# Altium PCB HD301_driver.PcbDoc (part 2 of 2)
Units mm, origin at the board's own origin, x right, y up, seen from the top; angles counter-clockwise.
Board outline 50 x 25 mm, 4 copper layers (Top, GND, POWER, Bottom), stack 0.899 mm thick; 105 components, 92 nets, 393 pads, 168 vias.
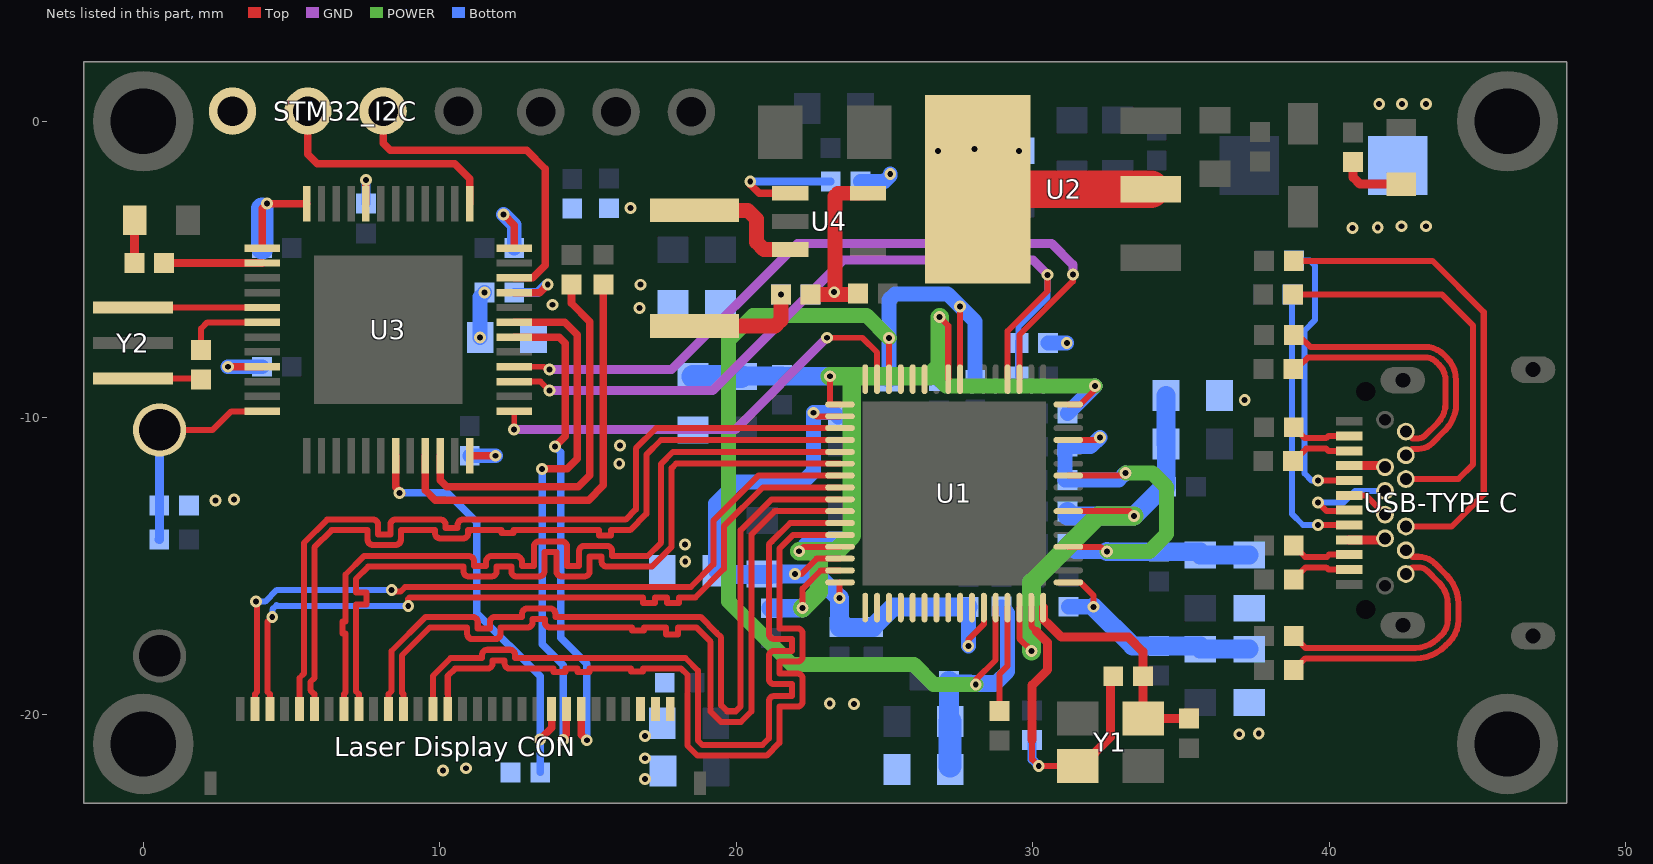
[diagram p4: the nets of this part, all layers, seen from the top]

## Via types
v1: diameter 0.4, hole 0.2, Top to Bottom, 155 vias
v2: diameter 0.6, hole 0.4, Top to Bottom, 12 vias
v3: diameter 1.6, hole 1, Top to Bottom, 1 vias

## Nets (pads, with @x,y where several pads share a name; then routed paths per layer and width w, separated by ;. In a path a pad name is that pad's centre, name@x,y a point inside that pad or via, vN(x,y) a via of type N, cw(c..) or ccw(c..) an arc to the next point about the centre after c; other vN are vias at no path point) (continued)
HD_RESET: "Laser Display CON.9" R17.1 U3.19 | length 14.9
  Top w0.254: U3.19@8.51,-11.28 8.51,-12.347 8.665,-12.501 v1@8.725,-12.562 ; v1(13.374,-20.849) 13.77,-20.453 13.77,-19.82
  Bottom w0.254: v1(8.636,-12.53) 10.254,-12.53 11.25,-13.526 11.25,-16.587 13.386,-18.723 13.386,-20.849 R17.1@13.386,-21.96
IIS_D0: U1.32
IIS_MCLK: U1.29
IIS_SCLK: U1.28
IIS_WS: U1.27
LED: R16.1 U3.2 | length 3.3
  Top w0.254: R16.1@0.7,-4.78 U3.2@4.01,-4.78
MIPI_N0_CLK_N: U1.54
MIPI_N0_CLK_P: U1.53
MIPI_N0_D0_N: U1.50
MIPI_N0_D0_P: U1.49
MIPI_N0_D1_N: U1.52
MIPI_N0_D1_P: U1.51
MIPI_N0_D2_N: U1.56
MIPI_N0_D2_P: U1.55
MIPI_N0_D3_N: U1.58
MIPI_N0_D3_P: U1.57
MIPI_N1_CLK_N: "Laser Display CON.28" U1.40 | length 26.1
  Top w0.203: 4.27,-19.82 4.27,-19.318 4.198,-19.246 4.198,-16.875 v1(4.351,-16.722) ; v1(8.936,-16.347) 8.926,-16.337 8.926,-16.112 8.978,-16.06 10.041,-16.06 16.846,-16.06 16.846,-16.244 17.252,-16.244 17.252,-16.06 17.659,-16.06 17.659,-16.244 18.065,-16.244 18.065,-16.06 18.268,-16.06 18.617,-16.06 19.582,-15.095 19.582,-13.659 20.892,-12.349 U1.40@23.496,-12.349
  Bottom w0.203: v1(4.351,-16.722) 4.351,-16.46 4.494,-16.317 4.524,-16.347 v1(8.936,-16.347)
MIPI_N1_CLK_P: "Laser Display CON.29" U1.39 | length 26
  Top w0.203: 3.77,-19.82 3.77,-19.318 3.842,-19.246 3.842,-16.242 v1(3.798,-16.198) ; v1(8.379,-15.802) 8.438,-15.861 8.675,-15.861 8.831,-15.705 18.467,-15.705 19.227,-14.946 19.227,-13.467 20.744,-11.949 U1.39@23.496,-11.949
  Bottom w0.203: v1(3.798,-16.198) 4.11,-16.198 4.507,-15.802 v1(8.379,-15.802)
MIPI_N1_D0_N: "Laser Display CON.25" U1.36 | length 27.8
  Top w0.203: 5.77,-19.82 5.77,-19.318 5.636,-19.184 5.636,-18.911 5.77,-18.776 5.77,-14.758 5.77,-14.371 6.352,-13.789 7.569,-13.789 7.569,-14.111 ccw(c7.746,-14.111) 7.746,-14.289 8.508,-14.289 ccw(c8.508,-14.111) 8.686,-14.111 8.686,-13.789 9.842,-13.789 9.842,-13.891 ccw(c10.02,-13.891) 10.02,-14.068 10.782,-14.068 ccw(c10.782,-13.891) 10.96,-13.891 10.96,-13.789 11.477,-13.789 11.68,-13.789 12.086,-13.789 12.086,-13.891 12.493,-13.891 12.493,-13.789 12.922,-13.789 13.356,-13.789 15.362,-13.789 15.362,-13.965 15.769,-13.965 15.769,-13.789 15.972,-13.789 16.417,-13.789 16.966,-13.24 16.966,-11.243 17.46,-10.749 U1.36@23.496,-10.749
MIPI_N1_D0_P: "Laser Display CON.26" U1.35 | length 27.8
  Top w0.203: 5.27,-19.82 5.27,-18.774 5.414,-18.629 5.414,-16.864 5.414,-14.224 6.205,-13.433 7.746,-13.433 cw(c7.746,-13.611) 7.924,-13.611 7.924,-13.933 8.331,-13.933 8.331,-13.611 cw(c8.508,-13.611) 8.508,-13.433 10.02,-13.433 cw(c10.02,-13.611) 10.198,-13.611 10.198,-13.713 10.604,-13.713 10.604,-13.611 cw(c10.782,-13.611) 10.782,-13.433 16.268,-13.433 16.611,-13.091 16.611,-11.029 17.291,-10.349 U1.35@23.496,-10.349
MIPI_N1_D1_N: "Laser Display CON.22" U1.38 | length 28
  Top w0.203: 7.27,-19.82 7.27,-19.318 7.175,-19.224 7.175,-17.929 7.175,-16.304 7.533,-16.304 7.533,-15.897 7.175,-15.897 7.175,-15.694 7.175,-15.432 7.587,-15.02 10.8,-15.02 10.8,-15.172 ccw(c10.977,-15.172) 10.977,-15.35 11.739,-15.35 ccw(c11.739,-15.172) 11.917,-15.172 11.917,-15.02 12.412,-15.02 12.412,-15.172 ccw(c12.59,-15.172) 12.59,-15.35 13.351,-15.35 ccw(c13.351,-15.172) 13.529,-15.172 13.529,-14.52 13.935,-14.52 13.935,-15.172 ccw(c14.113,-15.172) 14.113,-15.35 14.875,-15.35 ccw(c14.875,-15.172) 15.052,-15.172 15.052,-14.676 15.459,-14.676 15.459,-14.843 ccw(c15.636,-14.843) 15.636,-15.02 17.152,-15.02 17.817,-14.355 17.817,-12.116 ; 17.817,-11.907 17.817,-12.116 ; U1.38@23.496,-11.549 17.966,-11.549 17.817,-11.698 17.817,-12.116
MIPI_N1_D1_P: "Laser Display CON.23" U1.37 | length 27.8
  Top w0.203: 6.77,-19.82 6.77,-19.318 6.82,-19.268 6.82,-17.667 6.82,-17.279 6.719,-17.279 6.719,-16.872 6.82,-16.872 6.82,-16.466 6.82,-16.263 6.82,-15.285 7.44,-14.665 10.977,-14.665 cw(c10.977,-14.843) 11.155,-14.843 11.155,-14.995 11.561,-14.995 11.561,-14.843 cw(c11.739,-14.843) 11.739,-14.665 12.59,-14.665 cw(c12.59,-14.843) 12.767,-14.843 12.767,-14.995 13.174,-14.995 13.174,-14.343 cw(c13.351,-14.343) 13.351,-14.165 14.113,-14.165 cw(c14.113,-14.343) 14.291,-14.343 14.291,-14.995 14.697,-14.995 14.697,-14.498 cw(c14.875,-14.498) 14.875,-14.321 15.636,-14.321 cw(c15.636,-14.498) 15.814,-14.498 15.814,-14.665 17.004,-14.665 17.462,-14.207 17.462,-11.551 17.864,-11.149 U1.37@23.496,-11.149
MIPI_N1_D2_N: "Laser Display CON.19" U1.42 | length 27.9
  Top w0.203: 8.77,-19.82 8.77,-19.318 8.727,-19.275 8.727,-18.012 9.669,-17.069 10.925,-17.069 10.925,-17.289 ccw(c11.102,-17.289) 11.102,-17.467 11.864,-17.467 ccw(c11.864,-17.289) 12.042,-17.289 12.042,-17.069 12.956,-17.069 ccw(c12.956,-16.891) 13.133,-16.891 13.133,-16.783 13.54,-16.783 13.54,-16.891 ccw(c13.718,-16.891) 13.718,-17.069 15.537,-17.069 16.48,-17.069 16.48,-17.171 16.886,-17.171 16.886,-17.069 17.089,-17.069 17.627,-17.069 17.627,-17.306 18.034,-17.306 18.034,-17.069 18.237,-17.069 18.651,-17.069 19.135,-17.553 19.135,-19.911 19.475,-20.251 20.157,-20.251 20.503,-19.905 20.503,-13.939 21.294,-13.149 U1.42@23.496,-13.149
MIPI_N1_D2_P: "Laser Display CON.20" U1.41 | length 27.8
  Top w0.203: 8.27,-19.82 8.27,-19.318 8.371,-19.217 8.371,-17.865 9.522,-16.714 11.102,-16.714 cw(c11.102,-16.891) 11.28,-16.891 11.28,-17.112 11.687,-17.112 11.687,-16.891 cw(c11.864,-16.891) 11.864,-16.714 12.778,-16.714 12.778,-16.605 cw(c12.956,-16.605) 12.956,-16.427 13.718,-16.427 cw(c13.718,-16.605) 13.895,-16.605 13.895,-16.714 18.737,-16.714 ; 18.738,-16.714 18.798,-16.714 19.326,-17.243 19.49,-17.406 19.49,-19.696 19.69,-19.896 19.98,-19.896 20.148,-19.728 20.148,-13.792 21.191,-12.749 U1.41@23.496,-12.749
MIPI_N1_D3_N: "Laser Display CON.16" U1.44 | length 27.9
  Top w0.203: 10.27,-19.82 10.27,-19.318 10.268,-19.317 10.268,-18.705 10.516,-18.457 11.602,-18.457 ccw(c11.602,-18.279) 11.78,-18.279 11.78,-18.178 12.186,-18.178 12.186,-18.279 ccw(c12.364,-18.279) 12.364,-18.457 13.223,-18.457 13.426,-18.457 13.833,-18.457 13.833,-18.566 14.239,-18.566 14.239,-18.457 14.646,-18.457 14.646,-18.566 15.052,-18.566 15.052,-18.457 15.84,-18.457 16.044,-18.457 16.45,-18.457 16.45,-18.558 16.856,-18.558 16.856,-18.457 16.983,-18.457 18.138,-18.457 18.353,-18.672 18.353,-21.053 18.69,-21.39 21.024,-21.39 21.451,-20.963 21.451,-19.742 22.059,-19.742 ccw(c22.059,-19.564) 22.237,-19.564 22.237,-18.802 ccw(c22.059,-18.802) 22.059,-18.625 21.451,-18.625 21.451,-18.218 22.059,-18.218 ccw(c22.059,-18.041) 22.237,-18.041 22.237,-17.279 ccw(c22.059,-17.279) 22.059,-17.102 21.451,-17.102 21.451,-16.393 21.451,-14.416 21.918,-13.949 U1.44@23.496,-13.949
MIPI_N1_D3_P: "Laser Display CON.17" U1.43 | length 27.9
  Top w0.203: 9.77,-19.82 9.77,-18.7 10.369,-18.102 11.425,-18.102 11.425,-18 cw(c11.602,-18) 11.602,-17.822 12.364,-17.822 cw(c12.364,-18) 12.542,-18 12.542,-18.102 18.285,-18.102 18.708,-18.525 18.708,-20.89 18.853,-21.035 20.877,-21.035 21.095,-20.816 21.095,-19.564 cw(c21.273,-19.564) 21.273,-19.386 21.882,-19.386 21.882,-18.98 21.273,-18.98 cw(c21.273,-18.802) 21.095,-18.802 21.095,-18.041 cw(c21.273,-18.041) 21.273,-17.863 21.882,-17.863 21.882,-17.457 21.273,-17.457 cw(c21.273,-17.279) 21.095,-17.279 21.095,-14.269 21.2,-14.165 21.815,-13.549 U1.43@23.496,-13.549
NetC1_1: "USB-TYPE C.A2" C1.1 | length 2.1
  Top w0.203: C1.1@38.795,-15.449 39.201,-15.043 39.89,-15.043 39.962,-15.115 40.666,-15.115
NetC2_1: "USB-TYPE C.A3" C2.1 | length 2.1
  Top w0.203: C2.1@38.795,-14.306 39.176,-14.687 39.913,-14.687 39.985,-14.615 40.666,-14.615
NetC3_1: "USB-TYPE C.B8" C3.1 | length 16.3
  Top w0.203: C3.1@38.795,-4.71 43.474,-4.71 45.203,-6.439 45.203,-12.583 44.121,-13.665 42.576,-13.665
NetC4_1: "USB-TYPE C.A8" C4.1 | length 9.6
  Top w0.203: v1(39.613,-12.119) 40.662,-12.119 40.666,-12.115
  Bottom w0.203: C4.1@38.8,-4.7 39.35,-4.7 39.52,-4.87 39.52,-6.7 39.163,-7.057 39.163,-11.879 39.403,-12.119 v1(39.613,-12.119)
NetC5_1: "USB-TYPE C.B3" C5.1 | length 9.5
  Top w0.2: C5.1@39.009,-7.259 39.358,-7.607 43.215,-7.607
  Top w0.203: 42.576,-11.265 42.792,-11.049 43.002,-11.049 ccw(c43.002,-10.39) 43.467,-10.856 43.895,-10.428 ccw(c42.984,-9.517) 44.272,-9.517 44.272,-8.743 ccw(c43.168,-8.743) 43.949,-7.962 43.862,-7.875 ccw(c43.215,-8.523) 43.215,-7.607
NetC6_1: "USB-TYPE C.B2" C6.1 | length 8.4
  Top w0.2: C6.1@38.974,-8.269 39.281,-7.963 43.214,-7.963
  Top w0.203: 42.576,-10.465 42.804,-10.693 42.999,-10.693 ccw(c42.999,-10.384) 43.218,-10.603 43.642,-10.178 ccw(c42.98,-9.516) 43.917,-9.516 43.917,-8.745 ccw(c43.163,-8.745) 43.696,-8.212 43.611,-8.127 ccw(c43.214,-8.524) 43.214,-7.963
NetC44_1: "Laser Display CON.1" "Laser Display CON.2" "Laser Display CON.3" C44.1 C45.1 FB4.2
  other v1: 16.922,-22.186 16.922,-21.481 16.917,-20.729
NetC52_1: C52.1 C53.1 C57.2 FB5.1 FB6.1 FB7.1 FB8.1 L1.2 R21.2 | length 3.9
  Top w0.5: L1.2@18.595,-6.906 21.314,-6.906 21.504,-6.716 v1(21.504,-5.84)
  other v1: 36.958,-20.672 37.617,-20.646 23.972,-19.655 23.149,-19.632 18.278,-14.847 18.274,-14.273 16.734,-6.294 16.765,-5.512
NetC57_1: C57.1 R21.1 R22.2 U4.5 | length 6.8
  Top w0.5: R21.1@22.504,-5.84 23.3,-5.84 R22.2@24.104,-5.84 ; v1@23.322,-5.765 23.322,-2.539 23.431,-2.43 U4.5@24.44,-2.43
  Bottom w0.5: C57.1@22.504,-5.84 v1@23.3,-5.84
  other v1: 23.3,-5.765
NetL1_1: L1.1 U4.3 | length 4.2
  Top w0.5: L1.1@18.595,-3.006 20.387,-3.006 20.682,-3.302 20.682,-4.08 20.932,-4.33 U4.3@21.82,-4.33
NetLED1_1: LED1.1 R12.2 | length 2.2
  Top w0.305: R12.2@40.798,-1.374 40.798,-1.888 41.031,-2.122 LED1.1@42.425,-2.122
NetLED2_1: LED2.1 R16.2 | length 1.4
  Top w0.305: R16.2@-0.3,-4.78 -0.29,-4.77 LED2.1@-0.29,-3.34
NetR1_2: "USB-TYPE C.B11" R1.2 | length 8.6
  Top w0.203: R1.2@38.795,-17.362 39.189,-17.756 42.899,-17.756 ccw(c42.899,-16.678) 43.661,-17.44 43.783,-17.319 ccw(c43.285,-16.82) 43.989,-16.82 43.989,-16.273 ccw(c42.981,-16.273) 43.694,-15.56 43.296,-15.163 ccw(c43.005,-15.454) 43.005,-15.042 42.799,-15.042 42.576,-15.265
NetR2_2: "USB-TYPE C.B10" R2.2 | length 9.7
  Top w0.203: R2.2@38.795,-18.505 39.189,-18.112 42.9,-18.112 ccw(c42.9,-16.68) 43.912,-17.692 44.036,-17.568 ccw(c43.29,-16.823) 44.345,-16.823 44.345,-16.271 ccw(c42.987,-16.271) 43.947,-15.311 43.547,-14.91 ccw(c43.006,-15.45) 43.006,-14.686 42.797,-14.686 42.576,-14.465
NetR3_1: "USB-TYPE C.A5" R3.1 | length 9.7
  Top w0.203: v1(39.613,-13.615) 40.666,-13.615
  Bottom w0.203: R3.1@38.73,-5.62 38.73,-5.84 38.73,-13.236 39.11,-13.615 v1(39.613,-13.615)
NetR4_2: "USB-TYPE C.B5" R4.2 | length 13.7
  Top w0.203: R4.2@38.77,-5.84 43.79,-5.84 44.833,-6.883 44.833,-11.582 44.35,-12.065 42.576,-12.065
NetR5_1: "USB-TYPE C.A10" R5.1 | length 2.1
  Top w0.203: R5.1@38.795,-11.461 39.213,-11.043 39.89,-11.043 39.962,-11.115 40.666,-11.115
NetR6_1: "USB-TYPE C.A11" R6.1 | length 2.1
  Top w0.203: R6.1@38.795,-10.318 39.164,-10.687 39.89,-10.687 39.962,-10.615 40.666,-10.615
NetR13_1: R13.1 U3.22 | length 12.8
  Top w0.254: U3.22@10.01,-11.28 10.01,-12.112 10.229,-12.33 14.663,-12.33 15.063,-11.931 15.063,-6.766 14.441,-6.144 R13.1@14.441,-5.505
NetR14_1: R14.1 U3.21 | length 14.3
  Top w0.254: U3.21@9.51,-11.28 9.51,-12.435 9.852,-12.776 15.021,-12.776 15.516,-12.281 R14.1@15.516,-5.5
NetR18_1: R18.1 U3.6 | length 2.9
  Top w0.203: R18.1@1.95,-7.71 1.95,-6.99 2.16,-6.78 U3.6@4.01,-6.78
NetR18_2: R18.2 Y2.2 | length 2.3
  Top w0.203: Y2.2@-0.34,-8.68 1.92,-8.68 R18.2@1.95,-8.71
NetR19_1: R19.1 U3.33 | length 2.5
  Top w0.254: U3.33@12.51,-5.78 13.365,-5.78 v1(13.641,-5.504)
  Bottom w0.3: R19.1@12.51,-5.78 13.293,-5.78 13.569,-5.504 v1(13.641,-5.504)
NetR20_2: R20.2 U4.1 | length 4.3
  Top w0.254: v1(20.468,-2.032) 20.468,-2.133 20.765,-2.43 U4.1@21.82,-2.43
  Bottom w0.254: v1(20.468,-2.032) R20.2@23.182,-2.032
NetR23_2: R23.2 U3.44 | length 1.6
  Top w0.254: U3.44@7.51,-2.78 v1@7.51,-2.017
  Bottom w0.3: R23.2@7.51,-2.78 v1(7.51,-1.987)
NetU3_5: U3.5 Y2.1 | length 4.4
  Top w0.203: Y2.1@-0.34,-6.28 U3.5@4.01,-6.28
NRST: C49.1 R15.2 RESET.1 U3.12 | length 7.4
  Top w0.203: RESET.1@0.55,-10.41 2.34,-10.41 2.97,-9.78 U3.12@4.01,-9.78
  Bottom w0.305: C49.1@0.54,-14.106 0.55,-14.096 0.55,-12.961 RESET.1@0.55,-10.41
REXT: R11.2 U1.61 | length 3.6
  Top w0.203: R11.2@28.878,-19.882 28.878,-18.635 29.146,-18.367 U1.61@29.146,-16.399
RSTN: C7.1 R7.2 U1.20 U3.27 | length 28.1
  Top w0.2: U3.27@12.51,-8.78 13.395,-8.78 v1(13.694,-9.08) v1@13.709,-9.094 ; U1.20@29.146,-8.699 29.146,-7.077 30.497,-5.726 v1(30.497,-5.178)
  GND w0.305: v1(13.694,-9.08) 19.203,-9.08 23.597,-4.686 30.004,-4.686 v1(30.497,-5.178)
  Bottom w0.203: C7.1@29.505,-8.603 29.505,-7.48 29.505,-7.412 R7.2@29.51,-7.412 ; R7.2@29.51,-7.48 R7.2@29.51,-7.412 ; v1(30.497,-5.178) 30.497,-5.944 29.51,-6.931 R7.2@29.51,-7.412
SLEEP_33: U1.19 U3.28 | length 25.5
  Top w0.2: U3.28@12.51,-8.28 13.517,-8.28 v1@13.656,-8.419 ; U1.19@29.546,-8.699 29.546,-7.203 31.349,-5.4 v1(31.349,-5.17)
  GND w0.305: v1(13.704,-8.375) 17.812,-8.375 22.064,-4.123 30.632,-4.123 31.349,-4.839 v1(31.349,-5.17)
SWCLK: STM32_I2C.2 U3.37 | length 8.1
  Top w0.254: STM32_I2C.2@5.55,0.34 5.55,-1.111 5.875,-1.436 10.506,-1.436 11.01,-1.94 U3.37@11.01,-2.78
SWDIO: STM32_I2C.3 U3.34 | length 11.4
  Top w0.254: STM32_I2C.3@8.09,0.34 8.09,-0.738 8.33,-0.978 12.926,-0.978 13.558,-1.61 13.558,-4.851 13.13,-5.28 U3.34@12.51,-5.28
UART_RX: "Laser Display CON.8" U3.31 | length 18.3
  Top w0.254: U3.31@12.51,-6.78 14.218,-6.78 14.64,-7.202 14.64,-11.38 14.294,-11.726 v1(13.449,-11.726) ; v1(14.16,-20.861) 14.27,-20.751 14.27,-19.82
  Bottom w0.254: v1(13.449,-11.726) 13.449,-17.632 14.16,-18.343 v1(14.16,-20.861)
UART_TX: "Laser Display CON.7" U3.30 | length 16.9
  Top w0.254: U3.30@12.51,-7.28 14.026,-7.28 14.23,-7.484 14.23,-10.624 v1(13.88,-10.974) ; 14.77,-19.82 14.77,-20.687 v1(14.958,-20.875)
  Bottom w0.254: v1(13.88,-10.974) 14.077,-11.171 14.077,-17.417 14.958,-18.298 v1(14.958,-20.875)
USB_D_N: "USB-TYPE C.A7" "USB-TYPE C.B7" | length 1.5
  Top w0.203: 40.666,-12.615 41.226,-12.615 41.876,-13.265
USB_D_P: "USB-TYPE C.A6" "USB-TYPE C.B6" | length 3.6
  Top w0.203: v1(39.613,-12.859) 39.903,-13.149 40.666,-13.149 40.666,-13.115
  Bottom w0.203: v1(39.613,-12.859) 40.467,-12.859 40.861,-12.465 41.876,-12.465
VBUS: "USB-TYPE C.A4" "USB-TYPE C.A9" "USB-TYPE C.B4" "USB-TYPE C.B9" D1.A | length 2.5
  Top w0.305: 40.661,-11.61 40.666,-11.615 41.876,-11.615 41.876,-11.665 ; 40.666,-14.115 41.876,-14.115 41.876,-14.065
  other v1: 40.781,-3.603 41.628,-3.577 42.425,-3.541 43.26,-3.541 41.678,0.583 42.45,0.583 43.26,0.583
VCC12_TX: C33.1 C34.1 C35.1 C36.1 C37.1 FB6.2 U1.34 U1.46 U1.48 U1.59 | length 24.6
  Top w0.203: v1(21.98,-15.271) 22.189,-15.271 22.711,-14.749 U1.46@23.496,-14.749 ; v1(22.605,-9.83) 22.724,-9.949 U1.34@23.496,-9.949 ; v1(23.478,-16.08) 23.478,-15.549 U1.48@23.496,-15.549 ; v1(27.822,-17.701) 27.822,-17.481 28.346,-16.957 U1.59@28.346,-16.399
  Bottom w0.508: FB6.2@19.304,-15.159 19.304,-12.886 20.02,-12.17 22.25,-12.17 22.605,-11.815 v1(22.605,-9.83) 22.611,-9.824 23.284,-9.824 C34.1@23.427,-9.967 ; v1(27.822,-17.701) C37.1@27.822,-16.377
  Bottom w0.635: 19.802,-15.276 19.813,-15.287 20.874,-15.287 21.167,-15.287 21.167,-15.271 v1(21.98,-15.271) 22.669,-15.271 v1(23.478,-16.08) C35.1@23.478,-17.054 23.478,-17.071 24.616,-17.071 C36.1@24.616,-17.054 25.292,-16.377 C37.1@27.822,-16.377
VCC12A_RX: C28.1 C29.1 C30.1 C31.1 C32.1 FB7.2 U1.4 U1.10 U1.13 | length 20.8
  Top w0.203: U1.4@31.196,-14.349 32.285,-14.349 v1(32.501,-14.505) ; U1.10@31.196,-11.949 33.125,-11.949 v1(33.125,-11.864) ; U1.13@31.196,-10.749 32.259,-10.749 v1(32.259,-10.661)
  POWER w0.508: v1(32.501,-14.505) 33.927,-14.505 34.507,-13.925 34.507,-12.333 34.038,-11.864 v1(33.125,-11.864)
  Bottom w0.508: C31.1@31.085,-12.093 31.161,-12.093 32.896,-12.093 v1(33.125,-11.864) ; C31.1@31.085,-12.092 31.085,-10.975 C32.1@31.166,-10.975 31.945,-10.975 v1(32.259,-10.661) ; C30.1@31.166,-14.252 31.42,-14.505 v1(32.501,-14.505)
  Bottom w0.635: v1(32.501,-14.505) 32.501,-14.517 C29.1@34.248,-14.517 35.645,-14.517 C28.1@35.645,-14.625 FB7.2@37.296,-14.625
VCC12D_RX: C25.1 C26.1 C27.1 FB8.2 U1.1 | length 8.2
  Top w0.203: U1.1@31.196,-15.549 31.602,-15.549 32.041,-15.988 v1(32.041,-16.373)
  Bottom w0.508: C27.1@31.202,-16.372 v1(32.041,-16.373) v1(32.041,-16.373)
  Bottom w0.635: v1(32.041,-16.373) 33.361,-17.692 C26.1@34.248,-17.692 35.645,-17.692 C25.1@35.645,-17.8 FB8.2@37.296,-17.8
VCC33: C40.1 C41.1 C42.1 FB1.1 FB2.1 FB3.1 R7.1 R8.2 R9.2 R20.1 U2.2 U2.4 | length 7.6
  Top w1.27: U2.4@28.135,-2.297 U2.2@33.977,-2.297
  Bottom w0.5: R20.1@24.182,-2.032 24.993,-2.032 25.19,-1.834 v1(25.19,-1.78) ; R7.1@30.51,-7.48 v1(31.143,-7.48)
  other v1: 16.052,-11.548 16.075,-10.934 37.142,-9.399 13.804,-6.188 16.436,-2.922 26.807,-0.997 29.536,-0.998 28.036,-0.938
VCC33_RX: C16.1 C17.1 C18.1 C19.1 FB3.2 U1.7 U1.62 | length 19.1
  Top w0.203: U1.62@29.546,-16.399 29.546,-17.45 v1(29.958,-17.861) ; U1.7@31.196,-13.149 33.252,-13.149 v1(33.411,-13.308)
  POWER w0.635: v1(29.958,-17.861) 29.958,-15.554 32.203,-13.308 v1(33.411,-13.308)
  Bottom w0.508: v1(29.958,-17.861) 29.958,-16.476 30.056,-16.379 C19.1@30.057,-16.377
  Bottom w0.635: C18.1@31.166,-13.159 31.166,-13.308 v1(33.411,-13.308) 34.395,-12.325 C17.1@34.498,-12.325 34.498,-10.887 C16.1@34.49,-10.887 FB3.2@34.49,-9.248
VCC33_STM: C43.1 C50.2 C51.1 C58.1 FB1.2 R15.1 R17.2 R19.2 STM32_I2C.1 U3.1 U3.9 U3.24 U3.36 U3.48 | length 12.4
  Top w0.254: v1(2.863,-8.28) U3.9@4.01,-8.28 ; U3.1@4.01,-4.28 4.01,-2.941 v1(4.171,-2.78) U3.48@5.51,-2.78 ; U3.24@11.01,-11.28 v1(11.874,-11.28) ; v1(12.149,-3.14) 12.51,-3.5 U3.36@12.51,-4.28
  Bottom w0.5: v1(2.863,-8.28) C50.2@4.01,-8.28 ; C43.1@11.01,-11.28 v1(11.874,-11.28) ; v1(11.36,-7.29) 11.36,-5.93 v1(11.51,-5.78) ; v1(12.149,-3.14) 12.51,-3.5 C51.1@12.51,-4.28
  Bottom w0.75: C58.1@4.01,-4.28 4.01,-2.941
  other v1: 10.113,-21.888 10.878,-21.818 2.443,-12.789 3.06,-12.755
VCC33_TX: C10.1 C11.1 C12.1 C13.1 C14.1 C15.1 FB2.2 U1.16 U1.25 U1.33 U1.45 U1.47 | length 41.2
  Top w0.203: v1(22.12,-14.5) 22.271,-14.349 U1.45@23.496,-14.349 ; v1(22.234,-16.414) 22.234,-15.759 22.843,-15.149 U1.47@23.496,-15.149 ; v1(23.153,-8.599) 23.153,-9.549 U1.33@23.496,-9.549 ; v1(26.856,-6.607) 27.146,-6.897 U1.25@27.146,-8.699 ; U1.16@31.196,-9.549 31.606,-9.549 32.16,-8.995 32.165,-8.99 32.104,-8.93 v1(32.094,-8.93)
  POWER w0.508: 26.63,-8.496 27.064,-8.93 v1(32.094,-8.93)
  POWER w0.635: v1(22.12,-14.5) 22.97,-14.5 ; v1(22.234,-16.414) 22.78,-15.868 22.78,-14.69 22.97,-14.5 ; v1(23.153,-8.599) 23.889,-8.599 ; 26.527,-8.599 23.889,-8.599 ; 26.63,-8.496 26.856,-8.269 v1(26.856,-6.607) ; 22.97,-14.5 23.364,-14.5 23.889,-13.974 23.889,-8.599
  Bottom w0.508: v1(22.12,-14.5) 22.451,-14.168 C14.1@23.427,-14.168 ; C13.1@26.856,-8.722 v1(26.856,-6.607) ; C12.1@31.166,-9.857 v1(32.094,-8.93)
  Bottom w0.635: FB2.2@18.54,-8.58 20.166,-8.587 21.54,-8.594 v1@23.133,-8.601 ; C10.1@20.166,-8.606 C10.1@20.166,-8.601 ; C15.1@21.167,-16.422 22.226,-16.422 v1(22.234,-16.414)
  Bottom w0.762: FB2.2@18.537,-8.606 C10.1@20.166,-8.606
VDD: C20.1 C21.1 C22.1 C23.1 C24.1 FB5.2 U1.24 U1.30 U1.60 | length 48
  Top w0.203: U1.30@25.146,-8.699 v1@25.146,-7.305 ; U1.24@27.546,-8.699 v1(27.546,-6.242) ; v1(28.074,-18.989) 28.074,-18.839 28.746,-18.167 U1.60@28.746,-16.399
  POWER w0.508: v1(25.144,-7.305) 24.395,-6.556 20.569,-6.556 19.742,-7.383 19.742,-16.196 21.869,-18.323 25.989,-18.323 26.654,-18.989 v1(28.074,-18.989)
  Bottom w0.305: C24.1@25.144,-8.747 C24.1@25.176,-8.78
  Bottom w0.5: C24.1@25.144,-8.747 v1(25.144,-7.305)
  Bottom w0.508: v1(25.144,-7.305) 25.144,-6.052 ; 25.149,-6.028 25.356,-5.821 27.125,-5.821 v1(27.546,-6.242) 28.05,-6.746 C23.1@28.05,-8.722 ; C21.1@27.14,-18.929 27.17,-18.929 28.074,-18.929 28.774,-18.929 ; C21.1@27.14,-18.917 27.17,-18.917 27.882,-18.917 ; C21.1@27.154,-18.879 C21.1@27.17,-18.879 ; v1(28.074,-18.989) 28.714,-18.989 28.774,-18.929 ; C22.1@28.939,-16.377 29.141,-16.579 29.141,-18.562 28.774,-18.929
  Bottom w0.66: C21.1@27.17,-18.867 27.17,-18.879 27.17,-18.917 27.17,-18.929 27.17,-20.239 27.204,-20.239 C20.1@27.215,-20.239
  Bottom w0.762: FB5.2@27.204,-21.757 C20.1@27.204,-20.239
VSYNC: U1.31 U3.25 | length 15.3
  Top w0.2: v1@12.51,-10.398 U3.25@12.51,-9.78 ; v1(23.053,-7.302) 24.25,-7.302 24.746,-7.798 U1.31@24.746,-8.699
  GND w0.305: v1(12.5,-10.398) 19.957,-10.398 v1(23.053,-7.302)
XTALI: C9.1 R10.2 U1.64 Y1.3 | length 8.7
  Top w0.203: U1.64@30.346,-16.399 30.346,-16.777 30.352,-16.784 30.562,-16.993 30.56,-16.995
  Top w0.305: U1.64@30.352,-16.399 30.352,-16.784 30.352,-16.787 30.56,-16.995 30.964,-17.399 33.224,-17.399 33.712,-17.887 R10.2@33.712,-18.716 R10.2@33.712,-18.716 Y1.3@33.714,-20.144 ; Y1.3@33.714,-20.144 C9.1@35.265,-20.145
XTALO: C8.1 R10.1 U1.63 Y1.1 | length 11.6
  Top w0.203: U1.63@29.946,-16.399 29.946,-17.027 30.128,-17.209 ; 29.974,-20.869 29.974,-21.519 v1(30.199,-21.744) Y1.1@31.514,-21.744
  Top w0.305: 29.974,-20.869 29.974,-19.019 30.5,-18.493 30.5,-17.581 30.128,-17.209 ; Y1.1@31.639,-21.744 32.614,-20.769 32.614,-18.814 R10.1@32.712,-18.716
  Bottom w0.305: C8.1@29.974,-20.869 29.974,-21.519 v1(30.199,-21.744)
pads on no net: "Laser Display CON.0" "Laser Display CON.4" "Laser Display CON.5" "Laser Display CON.6" "Laser Display CON.10" "Laser Display CON.11" "Laser Display CON.13" "Laser Display CON.14" "USB-TYPE C.5" "USB-TYPE C.6" U1.23 U3.3 U3.4 U3.7 U3.10 U3.11 U3.13 U3.14 U3.15 U3.16 U3.17 U3.20 U3.29 U3.32 U3.38 U3.39 U3.40 U3.41 U3.42 U3.43 U3.45 U3.46 Y1.2 Y1.4

## Polygon pours and split planes (outlines as drawn)
VBUS on POWER "Top Layer-GND" (hatched 45Degree grid 0.508 track 0.6, remove dead copper, pour order 22): 40.375,1.148 43.839,1.148 43.839,-4.048 43.809,-4.077 43.927,-4.195 47.802,-4.195 47.802,-18.785 47.978,-18.962 40.137,-18.962 40.137,0.852 40.404,1.119
+5V on POWER "Top Layer-GND" (hatched 45Degree grid 0.508 track 0.6, remove dead copper, pour order 24): 30.619,-4.565 37.325,-4.565 37.383,-4.622 38.063,-5.303 38.063,-20.856 18.379,-20.856 18.379,-22.644 39.615,-22.644 39.609,1.42 24.75,1.42 24.75,0.024 30.619,0.024
NetC52_1 on POWER "Top Layer-GND" (hatched 45Degree grid 0.508 track 0.6, remove dead copper, pour order 28): 16.447,-5.369 20.973,-5.369 20.973,-16.128 20.929,-16.172 20.973,-16.128 33.496,-16.128 37.782,-16.172 37.782,-16.798 37.782,-19.969 16.463,-19.969 16.463,-13.113 18.039,-13.113 18.039,-8.887 16.447,-8.887
VCC33 on POWER "Top Layer-GND" (hatched 45Degree grid 0.508 track 0.6, remove dead copper, pour order 30): 13.294,1.783 24.174,1.783 24.431,1.526 24.43,-0.504 28.556,-0.504 30.198,-0.504 30.198,-5.321 36.933,-5.321 37.172,-5.56 37.142,-5.59 37.142,-15.402 22.11,-15.402 21.98,-15.271 21.946,-15.238 21.946,-4.872 15.694,-4.872 15.544,-5.022 15.544,-9.359 17.524,-9.359 17.524,-12.729 15.544,-12.729 15.544,-22.012 13.294,-22.012
VCC33_STM on POWER "Top Layer-GND" (hatched 45Degree grid 0.508 track 0.6, remove dead copper, pour order 32): -1.263,1.669 12.754,1.669 12.807,1.722 12.648,1.562 12.648,-22.421 -1.369,-22.421 -1.423,-22.474 -1.369,-22.421 -1.369,1.616
GND on GND "Top Layer-GND" (hatched 45Degree grid 0.508 track 0.6, remove dead copper, pour order 36): -2,2 48,2 48,-23 -2,-23 -2,2
GND on Top "Top Layer-GND" (hatched 45Degree grid 0.508 track 0.6, remove dead copper, pour order 40): -2.005,1.984 -1.954,1.933 47.968,1.933 47.968,-22.875 47.763,-23.079 -2.056,-23.079 -2.056,1.882 -1.903,2.035
GND on Bottom "Top Layer-GND" (hatched 45Degree grid 0.508 track 0.6, remove dead copper, pour order 42): -1.903,1.882 -1.801,1.984 47.968,1.984 47.968,-22.824 48.019,-22.875 -1.954,-22.875 -1.954,1.728 -1.75,1.933

## Keep-outs
GND:
  region: 37.457,-15.779 37.457,-13.976 39.133,-13.976 39.133,-15.779 37.457,-15.779
  region: 37.457,-11.792 37.457,-9.988 39.133,-9.988 39.133,-11.792 37.457,-11.792
  region: 37.472,-8.663 37.472,-6.86 39.148,-6.86 39.148,-8.663 37.472,-8.663
  region: 37.457,-19.335 37.457,-17.532 39.133,-17.532 39.133,-19.335 37.457,-19.335
Keep-Out Layer:
  the board outline again, w0.254

## Other copper
Top:
  rectangle net NetC44_1: 16.668,-22.518 17.938,-19.415
  rectangle net +5V: 30.858,-0.711 41.186,1.427
  rectangle net +5V: 23.87,-4.565 25.123,-3.285
  rectangle net +5V: 23.145,-1.201 25.618,1.422
  rectangle net NetC52_1: 16.492,-7.407 20.591,-5.258
  region net VCC33_TX: 23.086,-9.496 23.654,-9.496 23.654,-8.726 23.273,-8.345 23.086,-8.345 23.086,-9.496
POWER:
  rectangle net NetC52_1: 36.345,-21.016 38.063,-18.942
Bottom:
  rectangle net NetC44_1: 16.618,-22.571 17.929,-18.523
  rectangle net VBUS: 40.283,-4.22 43.81,1.22
  rectangle net +5V: 23.879,-1.201 25.811,1.514
  rectangle net +5V: 30.82,-0.62 35.085,1.319
  rectangle net +5V: 18.908,-22.616 22.399,-21.403
  rectangle net NetC52_1: 16.436,-7.426 20.573,-5.173
  rectangle net VCC33: 14.142,-3.248 16.777,-2.635
  rectangle net VCC33: 13.557,-7.832 14.23,-5.958
  rectangle net VCC33: 26.222,-1.369 30.02,0.547
  rectangle net VCC33_STM: 1.262,-13.198 3.546,-12.26
  rectangle net VCC33_STM: 9.723,-22.337 12.676,-21.438
  rectangle net +5V: 35.492,-2.54 39.623,1.292
  region net NetC52_1: 17.059,-15.695 18.481,-15.695 18.481,-14.024 17.059,-14.024
  region net NetC52_1: 36.649,-15.572 39.103,-15.572 39.103,-21.055 36.544,-21.055 36.544,-18.685 38.231,-18.685 38.231,-16.926 36.649,-16.926
  region net VCC33: 19.175,-11.887 19.175,-9.975 15.715,-9.975 15.715,-11.887
  region net VCC33: 35.443,-9.837 38.063,-9.837 38.063,-8.209 37.383,-7.529 37.024,-7.17 35.443,-7.17
  region net NetC52_1: 25.869,-21.22 25.869,-22.5 22.771,-22.5 22.771,-18.897 24.441,-18.897 24.441,-21.22

## Text inside footprints (layer, text, board x,y; h text height)
LT7911D_I2C: Silkscreen Top "1" at 19.454,1.177 h0.3 r180
STM32_I2C: Silkscreen Top "1" at 2.14,-0.64 h0.4